# Altium PCB etapa_1.PcbDoc
Units mm, origin at the board's own origin, x right, y up, seen from the top; angles counter-clockwise.
Board outline 52 x 52 mm, 6 copper layers (Top Layer, Pot_Gnd, X, Y, Ground, Bottom Layer); 444 components, 196 nets, 1134 pads, 0 vias.
Unrouted connection lines stored in the file: 918.
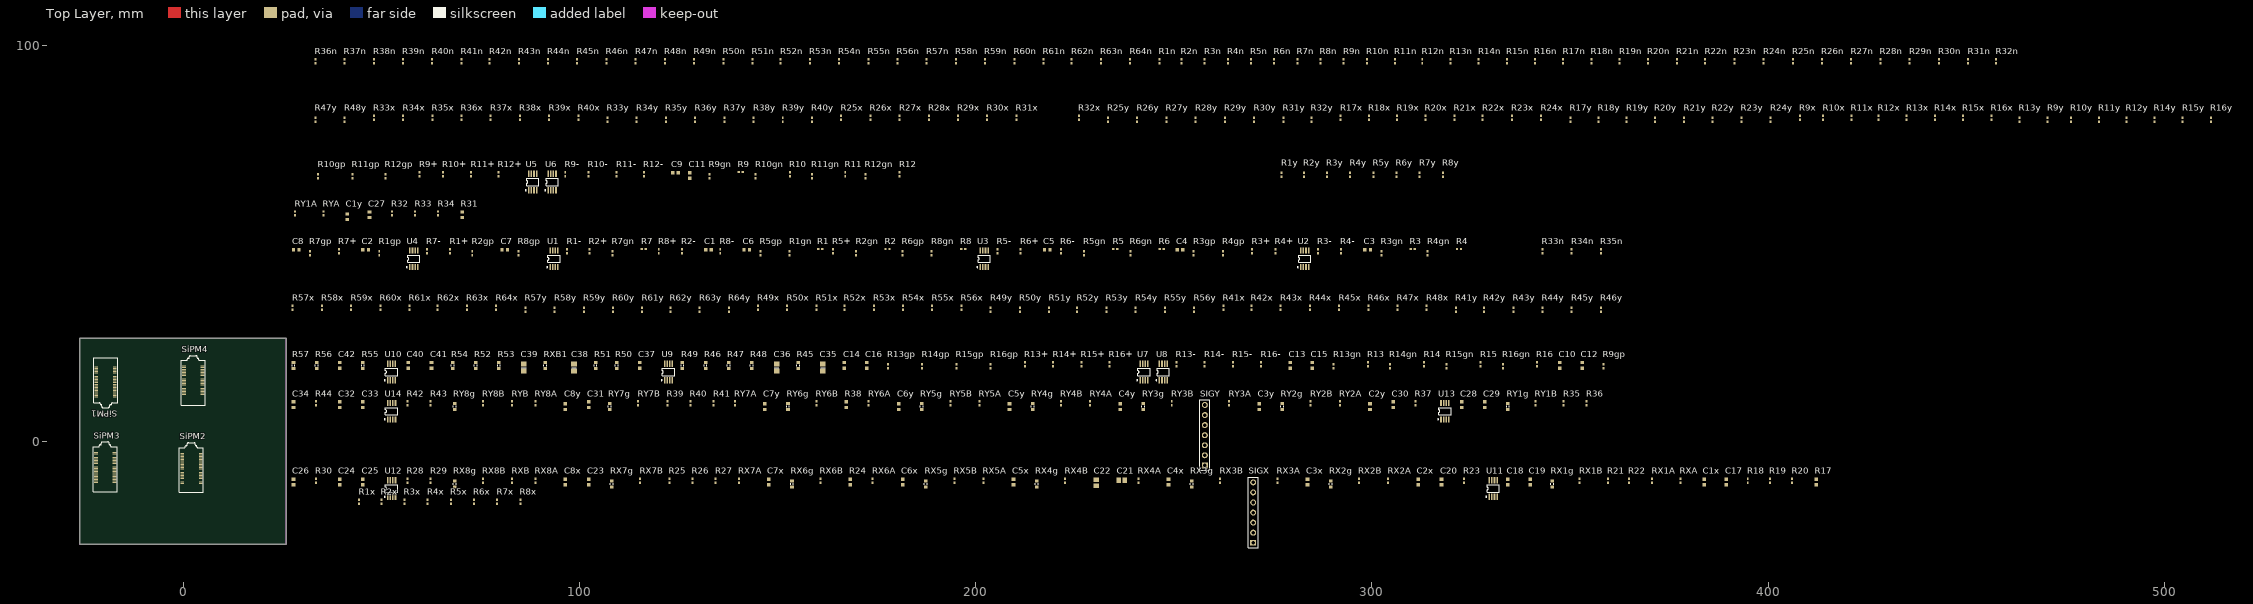
[diagram p0: Top Layer view]
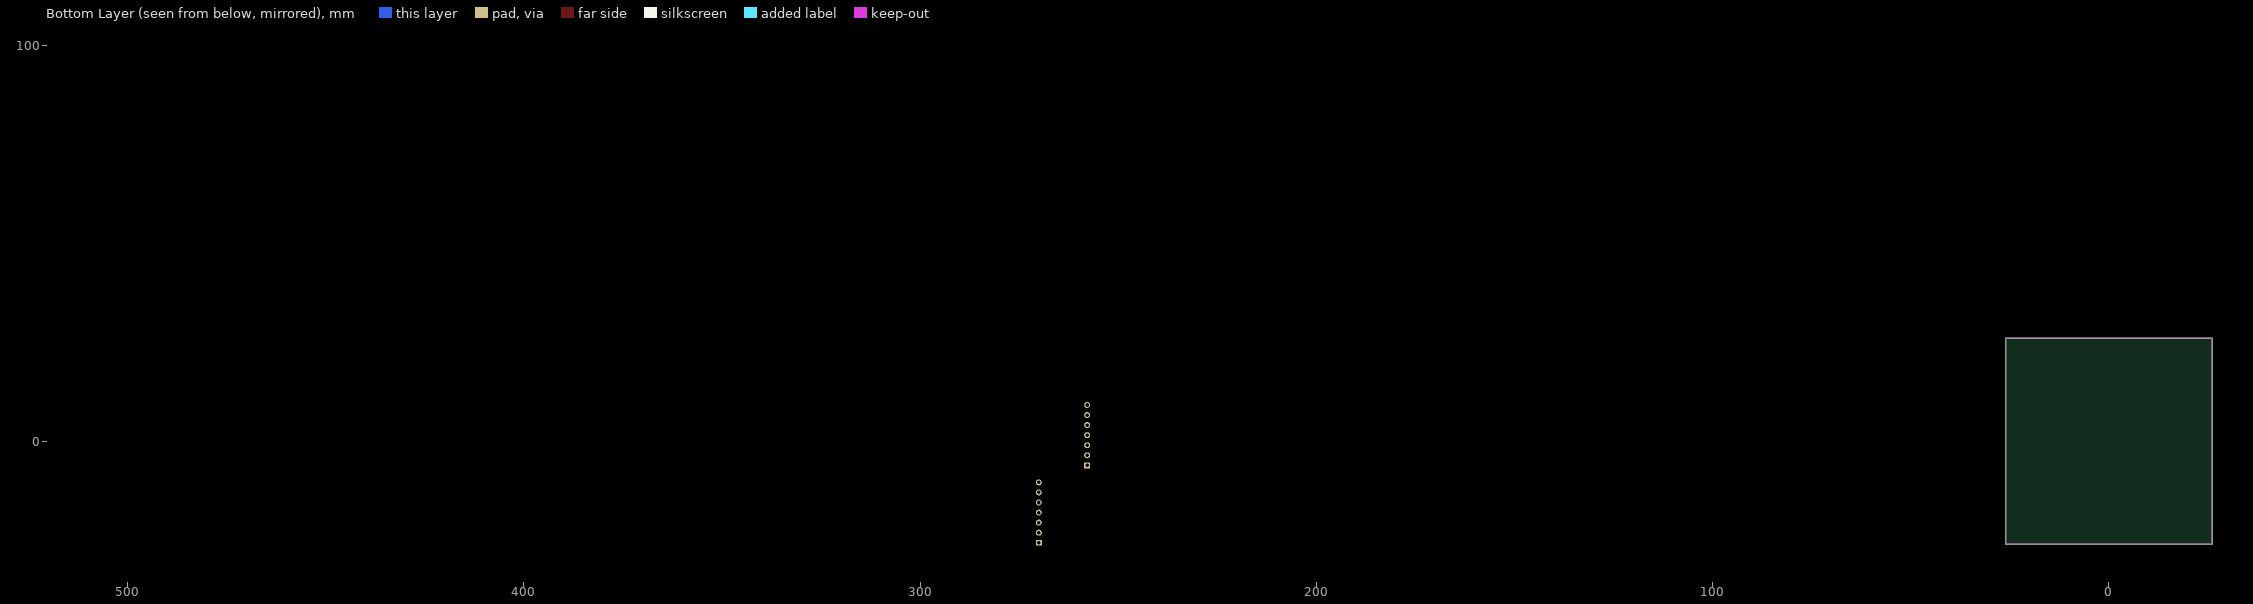
[diagram p1: Bottom Layer view, seen from below]
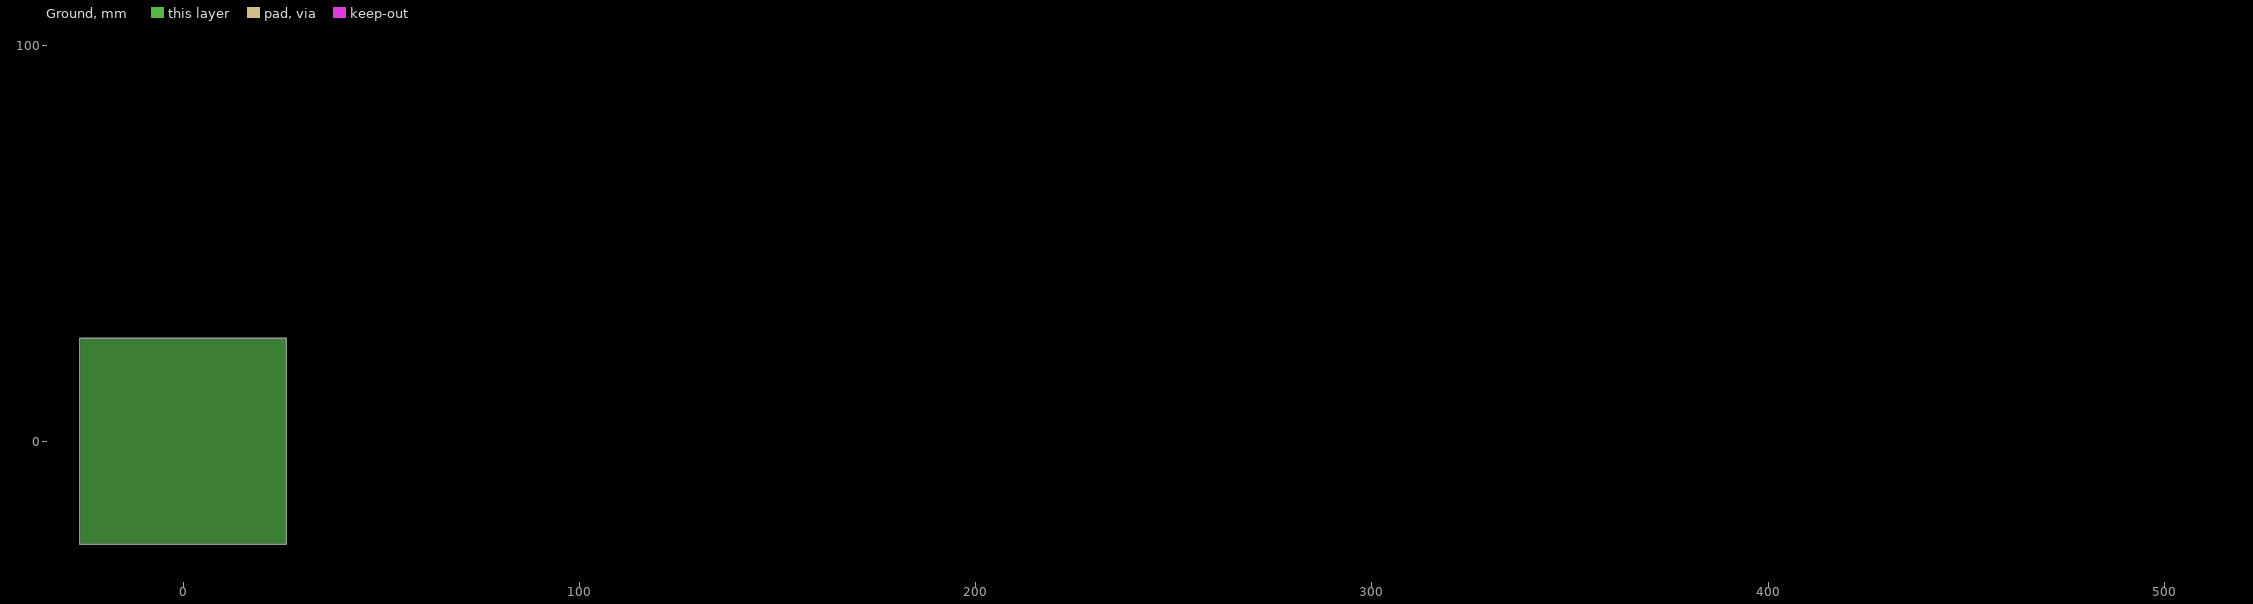
[diagram p2: Ground, clearances drawn from the general rule]

## Layer stack, top to bottom
Top Layer: signal copper 0.0356
Dielectric: prepreg 0.32, FR-4, Dk 4.8
Pot_Gnd: signal copper 0.0356
Dielectric: core 0.32, FR-4, Dk 4.8
X: signal copper 0.0356
Dielectric: prepreg 0.32, FR-4, Dk 4.8
Y: signal copper 0.0356
Dielectric: core 0.32, FR-4, Dk 4.8
Ground: plane copper 0.0356, net GND
Dielectric: prepreg 0.32, FR-4, Dk 4.8
Bottom Layer: signal copper 0.0356

## Board outline
-26,26 -26,-26 26,-26 26,26 -26,26

## Design rules (kind name [scope] priority, off if disabled: settings)
Clearance Clearance_2 [InComponent('SiPM1') vs ALL] p1: gap=0.15
Clearance Clearance_1 [IsTrack vs IsVia OR IsPad] p2: gap=0.203
Clearance [All] p3: gap=0.152
MinimumSolderMaskSliver MinimumSolderMaskSliver_1 [InComponent('SiPM1')] p1: minsoldermaskwidth=0.05
MinimumSolderMaskSliver [All] p2: minsoldermaskwidth=0.14
PasteMaskExpansion [InComponent('SiPM1')] p1: expansion=0
PlaneClearance [All] p1: clearance=0.508
PlaneConnect PlaneConnect_1 [IsVia AND InNet('GND')] p1: planeconnectstyle=Direct reliefexpansion=0.508 reliefentries=4 reliefconductorwidth=0.254 reliefairgap=0.254
PlaneConnect [All] p2: planeconnectstyle=Relief reliefexpansion=0.508 reliefentries=4 reliefconductorwidth=0.254 reliefairgap=0.254
PolygonConnect [All] p1: connectstyle=Relief reliefconductorwidth=0.254 reliefentries=4 polygonreliefangle="90 Angle"
RoutingTopology [All] p1: topology=Daisy_Balanced
RoutingVias [All] p1: holewidth=0.203 width=0.406 viastyle="Through Hole" minholewidth=0.203 minwidth=0.406 maxholewidth=0.203 maxwidth=0.406
SilkToSilkClearance [All] p1: silktosilkclearance=0.127
SilkscreenOverComponentPads [All] p1: minsilkscreentomaskgap=0.127
SolderMaskExpansion SolderMaskExpansion_2 [(InComponent('SiPM1') OR InComponent('SiPM2') OR InComponent('SiPM3') OR InComponent('SiPM4'))] p1: expansion=0.05
SolderMaskExpansion SolderMaskExpansion_1 [IsVia] p2: expansion=0.051
SolderMaskExpansion [All] p3: expansion=0.051
Width Width_1 [(InNet('GND') AND OnLayer('Bottom Layer'))] p1: maxlimit=0.381 minlimit=0.254 preferedwidth=0.305
Width [All] p2: maxlimit=0.381 minlimit=0.152 preferedwidth=0.152 toplayer_maxwidth=0.152 midlayer1_maxwidth=0.152 midlayer2_maxwidth=0.152 midlayer3_minwidth=0.254 midlayer3_prefwidth=0.305 bottomlayer_maxwidth=0.152 minimp=50.000000 maximp=50.000000 favimp=50.000000
21 further rules are at their usual default settings.

## Classes and differential pairs
component class etapa_1: R1y R2x R2y R3x R3y R4y R5y R6x R6y R7x R7y R8y R9x R9y R10x R10y R11x R11y R12x R12y R13x R13y R14x R14y R15x R15y R16x R16y R17x R17y R18x R18y R19x R19y R20x R20y R21x R21y R22x R22y R23x R23y R24x R24y R25x R25y R26x R26y R27x R27y R28x R28y R29x R29y R30x R30y R31x R31y R32x R32y R33x R33y R34x R34y R35x R35y R36x R36y R37x R37y R38x R38y R39x R39y R40x R40y R41x R41y R42x R42y R43x R43y R44x R44y R45x R45y R46x R46y R47x R47y R48x R48y R49x R49y R50x R50y R51x R51y R52x R52y R53x R53y R54x R54y R55x R55y R56x R56y R57x R57y R58x R58y R59x R59y R60x R60y R61x R61y R62x R62y R63x R63y R64x R64y SiPM1 SiPM2
component class etapa1_suma: C9 C10 C11 C12 C13 C14 C15 C16 C35 C36 C37 C38 C39 C40 C41 C42 R9 R9+ R9- R9gn R9gp R10 R10+ R10- R10gn R10gp R11 R11+ R11- R11gn R11gp R12 R12+ R12- R12gn R12gp R13 R13+ R13- R13gn R13gp R14 R14+ R14- R14gn R14gp R15 R15+ R15- R15gn R15gp R16 R16+ R16- R16gn R16gp R45 R46 R47 R48 R49 R50 R51 R52 R53 R54 R55 R56 R57 RXB1 U5 U6 U7 U8 U9 U10
component class etapa1_anger_X: C1x C2x C3x C4x C5x C6x C7x C8x C17 C18 C19 C20 C21 C22 C23 C24 C25 C26 R17 R18 R19 R20 R21 R22 R23 R24 R25 R26 R27 R28 R29 R30 RX1A RX1B RX1g RX2A RX2B RX2g RX3A RX3B RX3g RX4A RX4B RX4g RX5A RX5B RX5g RX6A RX6B RX6g RX7A RX7B RX7g RX8A RX8B RX8g RXA RXB SIGX U11 U12
component class etapa1_anger_Y: C1y C2y C3y C4y C5y C6y C7y C8y C27 C28 C29 C30 C31 C32 C33 C34 R31 R32 R33 R34 R35 R36 R37 R38 R39 R40 R41 R42 R43 R44 RY1A RY1B RY1g RY2A RY2B RY2g RY3A RY3B RY3g RY4A RY4B RY4g RY5A RY5B RY5g RY6A RY6B RY6g RY7A RY7B RY7g RY8A RY8B RY8g RYA RYB SIGY U13 U14
component class etapa_1_2: C1 C2 C3 C4 C5 C6 C7 C8 R1 R1+ R1- R1gn R1gp R1n R2 R2+ R2- R2gn R2gp R2n R3 R3+ R3- R3gn R3gp R3n R4 R4+ R4- R4gn R4gp R4n R5 R5+ R5- R5gn R5gp R5n R6 R6+ R6- R6gn R6gp R6n R7 R7+ R7- R7gn R7gp R7n R8 R8+ R8- R8gn R8gp R8n R9n R10n R11n R12n R13n R14n R15n R16n R17n R18n R19n R20n R21n R22n R23n R24n R25n R26n R27n R28n R29n R30n R31n R32n R33n R34n R35n R36n R37n R38n R39n R40n R41n R42n R43n R44n R45n R46n R47n R48n R49n R50n R51n R52n R53n R54n R55n R56n R57n R58n R59n R60n R61n R62n R63n R64n SiPM3 SiPM4 U1 U2 U3 U4

## Components (designator, comment, footprint, x,y, rotation, side; value= is the part's Value field where it differs from the comment)
C1 "Cap" 1608[0603] 132.607,48.381 r0 top
C1x "Cap" 1608[0603] 383.915,-10.243 r90 top
C1y "Cap" 1608[0603] 41.472,56.712 r90 top
C2 "Cap" 1608[0603] 46.069,48.381 r0 top
C2x "Cap" 1608[0603] 311.728,-10.243 r90 top
C2y "Cap" 1608[0603] 299.561,8.782 r90 top
C3 "Cap" 1608[0603] 298.952,48.381 r0 top
C3x "Cap" 1608[0603] 283.788,-10.243 r90 top
C3y "Cap" 1608[0603] 271.596,8.782 r90 top
C4 "Cap" 1608[0603] 251.606,48.381 r0 top
C4x "Cap" 1608[0603] 248.71,-10.243 r90 top
C4y "Cap" 1608[0603] 236.518,8.782 r90 top
C5 "Cap" 1608[0603] 218.078,48.381 r0 top
C5x "Cap" 1608[0603] 209.594,-10.243 r90 top
C5y "Cap" 1608[0603] 208.578,8.782 r90 top
C6 "Cap" 1608[0603] 142.284,48.381 r0 top
C6x "Cap" 1608[0603] 181.629,-10.243 r90 top
C6y "Cap" 1608[0603] 180.613,8.782 r90 top
C7 "Cap" 1608[0603] 81.223,48.381 r0 top
C7x "Cap" 1608[0603] 147.847,-10.243 r90 top
C7y "Cap" 1608[0603] 146.831,8.782 r90 top
C8 "Cap" 1608[0603] 28.543,48.381 r0 top
C8x "Cap" 1608[0603] 96.514,-10.243 r90 top
C8y "Cap" 1608[0603] 96.514,8.782 r90 top
C9 "Cap" 1608[0603] 124.276,67.761 r0 top
C10 "Cap" 1608[0603] 347.491,19.171 r90 top
C11 "Cap" 1608[0603] 127.933,67.1 r90 top
C12 "Cap" 1608[0603] 353.079,19.171 r90 top
C13 "Cap" 1608[0603] 279.394,19.171 r90 top
C14 "Cap" 1608[0603] 166.922,19.171 r90 top
C15 "Cap" 1608[0603] 284.982,19.171 r90 top
C16 "Cap" 1608[0603] 172.51,19.171 r90 top
C17 "Cap" 1608[0603] 389.503,-10.243 r90 top
C18 "Cap" 1608[0603] 334.359,-10.243 r90 top
C19 "Cap" 1608[0603] 339.947,-10.243 r90 top
C20 "Cap" 1608[0603] 317.595,-10.243 r90 top
C21 "Cap Pol3" C0805 236.874,-9.836 r0 top
C22 "Cap Pol3" C0805 230.422,-10.446 r90 top
C23 "Cap" 1608[0603] 102.356,-10.243 r90 top
C24 "Cap" 1608[0603] 39.567,-10.243 r90 top
C25 "Cap" 1608[0603] 45.409,-10.243 r90 top
C26 "Cap" 1608[0603] 27.883,-10.243 r90 top
C27 "Cap" 1608[0603] 47.06,57.22 r90 top
C28 "Cap" 1608[0603] 322.675,9.29 r90 top
C29 "Cap" 1608[0603] 328.517,9.29 r90 top
C30 "Cap" 1608[0603] 305.403,9.29 r90 top
C31 "Cap" 1608[0603] 102.356,9.29 r90 top
C32 "Cap" 1608[0603] 39.567,9.29 r90 top
C33 "Cap" 1608[0603] 45.409,9.29 r90 top
C34 "Cap" 1608[0603] 27.883,9.29 r90 top
C35 "Cap" 6-0805_N 161.487,18.637 r90 top
C36 "Cap Pol3" 6-0805_N 149.803,18.637 r90 top
C37 "Cap" 1608[0603] 115.284,19.171 r90 top
C38 "Cap" 6-0805_N 98.673,18.637 r90 top
C39 "Cap Pol3" 6-0805_N 85.973,18.637 r90 top
C40 "Cap" 1608[0603] 56.839,19.171 r90 top
C41 "Cap" 1608[0603] 62.706,19.171 r90 top
C42 "Cap" 1608[0603] 39.567,19.171 r90 top
R1 "Res3" 0402 160.776,48.584 r0 top
R1+ "Res3" 0402 67.405,48.025 r90 top
R1- "Res3" 0402 96.945,48.025 r90 top
R1gn "Res3" 0402 153.105,47.517 r90 top
R1gp "Res3" 0402 49.524,47.517 r90 top
R1n "Res3" 0402 246.374,95.955 r90 top
R1x "Res3" 0402 44.444,-15.196 r90 top
R1y "Res3" 0402 277.26,67.329 r90 top
R2 "Res3" 0402 177.794,48.584 r0 top
R2+ "Res3" 0402 102.533,48.025 r90 top
R2- "Res3" 0402 125.901,48.025 r90 top
R2gn "Res3" 0402 169.869,47.517 r90 top
R2gp "Res3" 0402 72.993,47.517 r90 top
R2n "Res3" 0402 251.987,95.955 r90 top
R2x "Res3" 0402 50.057,-15.196 r90 top
R2y "Res3" 0402 282.848,67.329 r90 top
R3 "Res3" 0402 310.331,48.584 r0 top
R3+ "Res3" 0402 269.818,48.025 r90 top
R3- "Res3" 0402 286.404,48.025 r90 top
R3gn "Res3" 0402 302.406,47.517 r90 top
R3gp "Res3" 0402 255.06,47.517 r90 top
R3n "Res3" 0402 257.829,95.955 r90 top
R3x "Res3" 0402 55.899,-15.196 r90 top
R3y "Res3" 0402 288.69,67.329 r90 top
R4 "Res3" 0402 322.015,48.584 r0 top
R4+ "Res3" 0402 275.66,48.025 r90 top
R4- "Res3" 0402 292.246,48.025 r90 top
R4gn "Res3" 0402 314.09,47.517 r90 top
R4gp "Res3" 0402 262.452,47.517 r90 top
R4n "Res3" 0402 263.671,95.955 r90 top
R4x "Res3" 0402 61.741,-15.196 r90 top
R4y "Res3" 0402 294.557,67.329 r90 top
R5 "Res3" 0402 235.299,48.584 r0 top
R5+ "Res3" 0402 164.027,48.025 r90 top
R5- "Res3" 0402 205.53,48.025 r90 top
R5gn "Res3" 0402 227.374,47.517 r90 top
R5gp "Res3" 0402 145.739,47.517 r90 top
R5n "Res3" 0402 269.513,95.955 r90 top
R5x "Res3" 0402 67.583,-15.196 r90 top
R5y "Res3" 0402 300.399,67.329 r90 top
R6 "Res3" 0402 246.983,48.584 r0 top
R6+ "Res3" 0402 211.372,48.025 r90 top
R6- "Res3" 0402 221.532,48.025 r90 top
R6gn "Res3" 0402 239.058,47.517 r90 top
R6gp "Res3" 0402 181.578,47.517 r90 top
R6n "Res3" 0402 275.355,95.955 r90 top
R6x "Res3" 0402 73.425,-15.196 r90 top
R6y "Res3" 0402 306.241,67.329 r90 top
R7 "Res3" 0402 116.3,48.584 r0 top
R7+ "Res3" 0402 39.364,48.025 r90 top
R7- "Res3" 0402 61.538,48.025 r90 top
R7gn "Res3" 0402 108.375,47.517 r90 top
R7gp "Res3" 0402 31.998,47.517 r90 top
R7n "Res3" 0402 281.222,95.955 r90 top
R7x "Res3" 0402 79.292,-15.196 r90 top
R7y "Res3" 0402 312.083,67.329 r90 top
R8 "Res3" 0402 196.869,48.584 r0 top
R8+ "Res3" 0402 120.059,48.025 r90 top
R8- "Res3" 0402 135.579,48.025 r90 top
R8gn "Res3" 0402 188.944,47.517 r90 top
R8gp "Res3" 0402 84.677,47.517 r90 top
R8n "Res3" 0402 287.064,95.955 r90 top
R8x "Res3" 0402 85.134,-15.196 r90 top
R8y "Res3" 0402 317.925,67.329 r90 top
R9 "Res3" 0402 140.735,67.964 r0 top
R9+ "Res3" 0402 59.734,67.405 r90 top
R9- "Res3" 0402 96.463,67.405 r90 top
R9gn "Res3" 0402 132.81,66.897 r90 top
R9gp "Res3" 0402 358.489,18.967 r90 top
R9n "Res3" 0402 292.906,95.955 r90 top
R9x "Res3" 0402 408.045,81.68 r90 top
R9y "Res3" 0402 470.579,81.172 r90 top
R10 "Res3" 0402 153.13,67.405 r90 top
R10+ "Res3" 0402 65.576,67.405 r90 top
R10- "Res3" 0402 102.33,67.405 r90 top
R10gn "Res3" 0402 144.494,66.897 r90 top
R10gp "Res3" 0402 34.08,66.897 r90 top
R10n "Res3" 0402 298.748,95.955 r90 top
R10x "Res3" 0402 413.912,81.68 r90 top
R10y "Res3" 0402 476.421,81.172 r90 top
R11 "Res3" 0402 167.126,67.405 r90 top
R11+ "Res3" 0402 72.714,67.405 r90 top
R11- "Res3" 0402 109.442,67.405 r90 top
R11gn "Res3" 0402 158.744,66.897 r90 top
R11gp "Res3" 0402 42.716,66.897 r90 top
R11n "Res3" 0402 305.86,95.955 r90 top
R11x "Res3" 0402 421.024,81.68 r90 top
R11y "Res3" 0402 483.533,81.172 r90 top
R12 "Res3" 0402 180.842,67.405 r90 top
R12+ "Res3" 0402 79.572,67.405 r90 top
R12- "Res3" 0402 116.3,67.405 r90 top
R12gn "Res3" 0402 172.206,66.897 r90 top
R12gp "Res3" 0402 51.098,66.897 r90 top
R12n "Res3" 0402 312.744,95.955 r90 top
R12x "Res3" 0402 427.882,81.68 r90 top
R12y "Res3" 0402 490.417,81.172 r90 top
R13 "Res3" 0402 299.002,19.475 r90 top
R13+ "Res3" 0402 212.465,19.475 r90 top
R13- "Res3" 0402 250.717,19.475 r90 top
R13gn "Res3" 0402 290.366,18.967 r90 top
R13gp "Res3" 0402 177.895,18.967 r90 top
R13n "Res3" 0402 319.856,95.955 r90 top
R13x "Res3" 0402 434.994,81.68 r90 top
R13y "Res3" 0402 463.467,81.172 r90 top
R14 "Res3" 0402 313.226,19.475 r90 top
R14+ "Res3" 0402 219.577,19.475 r90 top
R14- "Res3" 0402 257.829,19.475 r90 top
R14gn "Res3" 0402 304.59,18.967 r90 top
R14gp "Res3" 0402 186.531,18.967 r90 top
R14n "Res3" 0402 326.968,95.955 r90 top
R14x "Res3" 0402 442.106,81.68 r90 top
R14y "Res3" 0402 497.529,81.172 r90 top
R15 "Res3" 0402 327.476,19.475 r90 top
R15+ "Res3" 0402 226.689,19.475 r90 top
R15- "Res3" 0402 264.941,19.475 r90 top
R15gn "Res3" 0402 318.84,18.967 r90 top
R15gp "Res3" 0402 195.193,18.967 r90 top
R15n "Res3" 0402 334.08,95.955 r90 top
R15x "Res3" 0402 449.218,81.68 r90 top
R15y "Res3" 0402 504.641,81.172 r90 top
R16 "Res3" 0402 341.7,19.475 r90 top
R16+ "Res3" 0402 233.801,19.475 r90 top
R16- "Res3" 0402 272.078,19.475 r90 top
R16gn "Res3" 0402 333.064,18.967 r90 top
R16gp "Res3" 0402 203.829,18.967 r90 top
R16n "Res3" 0402 341.192,95.955 r90 top
R16x "Res3" 0402 456.355,81.68 r90 top
R16y "Res3" 0402 511.753,81.172 r90 top
R17 "Res3" 1608[0603] 412.134,-10.243 r90 top
R17n "Res3" 0402 348.304,95.955 r90 top
R17x "Res3" 0402 292.144,81.68 r90 top
R17y "Res3" 0402 350.107,81.172 r90 top
R18 "Res3" 0402 394.887,-9.938 r90 top
R18n "Res3" 0402 355.441,95.955 r90 top
R18x "Res3" 0402 299.282,81.68 r90 top
R18y "Res3" 0402 357.219,81.172 r90 top
R19 "Res3" 0402 400.501,-9.938 r90 top
R19n "Res3" 0402 362.553,95.955 r90 top
R19x "Res3" 0402 306.394,81.68 r90 top
R19y "Res3" 0402 364.331,81.172 r90 top
R20 "Res3" 0402 406.089,-9.938 r90 top
R20n "Res3" 0402 369.665,95.955 r90 top
R20x "Res3" 0402 313.506,81.68 r90 top
R20y "Res3" 0402 371.443,81.172 r90 top
R21 "Res3" 0402 359.581,-9.938 r90 top
R21n "Res3" 0402 377.031,95.955 r90 top
R21x "Res3" 0402 320.872,81.68 r90 top
R21y "Res3" 0402 378.835,81.172 r90 top
R22 "Res3" 0402 364.915,-9.938 r90 top
R22n "Res3" 0402 384.143,95.955 r90 top
R22x "Res3" 0402 327.984,81.68 r90 top
R22y "Res3" 0402 385.947,81.172 r90 top
R23 "Res3" 0402 323.234,-9.938 r90 top
R23n "Res3" 0402 391.535,95.955 r90 top
R23x "Res3" 0402 335.375,81.68 r90 top
R23y "Res3" 0402 393.313,81.172 r90 top
R24 "Res3" 1608[0603] 168.421,-10.243 r90 top
R24n "Res3" 0402 398.901,95.955 r90 top
R24x "Res3" 0402 342.741,81.68 r90 top
R24y "Res3" 0402 400.679,81.172 r90 top
R25 "Res3" 0402 122.726,-9.938 r90 top
R25n "Res3" 0402 406.267,95.955 r90 top
R25x "Res3" 0402 166.084,81.68 r90 top
R25y "Res3" 0402 233.445,81.172 r90 top
R26 "Res3" 0402 128.568,-9.938 r90 top
R26n "Res3" 0402 413.633,95.955 r90 top
R26x "Res3" 0402 173.476,81.68 r90 top
R26y "Res3" 0402 240.811,81.172 r90 top
R27 "Res3" 0402 134.41,-9.938 r90 top
R27n "Res3" 0402 420.999,95.955 r90 top
R27x "Res3" 0402 180.842,81.68 r90 top
R27y "Res3" 0402 248.177,81.172 r90 top
R28 "Res3" 0402 56.661,-9.938 r90 top
R28n "Res3" 0402 428.365,95.955 r90 top
R28x "Res3" 0402 188.208,81.68 r90 top
R28y "Res3" 0402 255.568,81.172 r90 top
R29 "Res3" 0402 62.503,-9.938 r90 top
R29n "Res3" 0402 435.756,95.955 r90 top
R29x "Res3" 0402 195.574,81.68 r90 top
R29y "Res3" 0402 262.934,81.172 r90 top
R30 "Res3" 0402 33.522,-9.938 r90 top
R30n "Res3" 0402 443.122,95.955 r90 top
R30x "Res3" 0402 202.94,81.68 r90 top
R30y "Res3" 0402 270.3,81.172 r90 top
R31 "Res3" 1608[0603] 70.453,57.22 r90 top
R31n "Res3" 0402 450.488,95.955 r90 top
R31x "Res3" 0402 210.331,81.68 r90 top
R31y "Res3" 0402 277.666,81.172 r90 top
R32 "Res3" 0402 52.724,57.525 r90 top
R32n "Res3" 0402 457.6,95.955 r90 top
R32x "Res3" 0402 226.079,81.68 r90 top
R32y "Res3" 0402 284.778,81.172 r90 top
R33 "Res3" 0402 58.566,57.525 r90 top
R33n "Res3" 0402 343.071,48.025 r90 top
R33x "Res3" 0402 48.177,81.68 r90 top
R33y "Res3" 0402 107.131,81.172 r90 top
R34 "Res3" 0402 64.408,57.525 r90 top
R34n "Res3" 0402 350.437,48.025 r90 top
R34x "Res3" 0402 55.543,81.68 r90 top
R34y "Res3" 0402 114.497,81.172 r90 top
R35 "Res3" 0402 348.405,9.595 r90 top
R35n "Res3" 0402 357.803,48.025 r90 top
R35x "Res3" 0402 62.909,81.68 r90 top
R35y "Res3" 0402 121.863,81.172 r90 top
R36 "Res3" 0402 354.247,9.595 r90 top
R36n "Res3" 0402 33.395,95.955 r90 top
R36x "Res3" 0402 70.275,81.68 r90 top
R36y "Res3" 0402 129.254,81.172 r90 top
R37 "Res3" 0402 311.042,9.595 r90 top
R37n "Res3" 0402 40.761,95.955 r90 top
R37x "Res3" 0402 77.641,81.68 r90 top
R37y "Res3" 0402 136.62,81.172 r90 top
R38 "Res3" 1608[0603] 167.405,9.29 r90 top
R38n "Res3" 0402 48.152,95.955 r90 top
R38x "Res3" 0402 85.033,81.68 r90 top
R38y "Res3" 0402 143.986,81.172 r90 top
R39 "Res3" 0402 122.218,9.595 r90 top
R39n "Res3" 0402 55.518,95.955 r90 top
R39x "Res3" 0402 92.399,81.68 r90 top
R39y "Res3" 0402 151.352,81.172 r90 top
R40 "Res3" 0402 128.06,9.595 r90 top
R40n "Res3" 0402 62.884,95.955 r90 top
R40x "Res3" 0402 99.765,81.68 r90 top
R40y "Res3" 0402 158.718,81.172 r90 top
R41 "Res3" 0402 133.902,9.595 r90 top
R41n "Res3" 0402 70.25,95.955 r90 top
R41x "Res3" 0402 262.528,33.75 r90 top
R41y "Res3" 0402 321.227,33.242 r90 top
R42 "Res3" 0402 56.661,9.595 r90 top
R42n "Res3" 0402 77.362,95.955 r90 top
R42x "Res3" 0402 269.64,33.75 r90 top
R42y "Res3" 0402 328.339,33.242 r90 top
R43 "Res3" 0402 62.503,9.595 r90 top
R43n "Res3" 0402 84.753,95.955 r90 top
R43x "Res3" 0402 277.006,33.75 r90 top
R43y "Res3" 0402 335.731,33.242 r90 top
R44 "Res3" 0402 33.522,9.595 r90 top
R44n "Res3" 0402 92.119,95.955 r90 top
R44x "Res3" 0402 284.372,33.75 r90 top
R44y "Res3" 0402 343.097,33.242 r90 top
R45 "Res3" J1-0603 155.238,19.171 r90 top
R45n "Res3" 0402 99.485,95.955 r90 top
R45x "Res3" 0402 291.763,33.75 r90 top
R45y "Res3" 0402 350.463,33.242 r90 top
R46 "Res3" J1-0603 131.87,19.171 r90 top
R46n "Res3" 0402 106.851,95.955 r90 top
R46x "Res3" 0402 299.129,33.75 r90 top
R46y "Res3" 0402 357.829,33.242 r90 top
R47 "Res3" J1-0603 137.712,19.171 r90 top
R47n "Res3" 0402 114.217,95.955 r90 top
R47x "Res3" 0402 306.495,33.75 r90 top
R47y "Res3" 0402 33.42,81.172 r90 top
R48 "Res3" J1-0603 143.554,19.171 r90 top
R48n "Res3" 0402 121.583,95.955 r90 top
R48x "Res3" 0402 313.861,33.75 r90 top
R48y "Res3" 0402 40.786,81.172 r90 top
R49 "Res3" J1-0603 126.028,19.171 r90 top
R49n "Res3" 0402 128.975,95.955 r90 top
R49x "Res3" 0402 145.104,33.75 r90 top
R49y "Res3" 0402 203.803,33.242 r90 top
R50 "Res3" J1-0603 109.442,19.171 r90 top
R50n "Res3" 0402 136.341,95.955 r90 top
R50x "Res3" 0402 152.47,33.75 r90 top
R50y "Res3" 0402 211.195,33.242 r90 top
R51 "Res3" J1-0603 104.108,19.171 r90 top
R51n "Res3" 0402 143.707,95.955 r90 top
R51x "Res3" 0402 159.836,33.75 r90 top
R51y "Res3" 0402 218.561,33.242 r90 top
R52 "Res3" J1-0603 73.882,19.171 r90 top
R52n "Res3" 0402 150.819,95.955 r90 top
R52x "Res3" 0402 166.948,33.75 r90 top
R52y "Res3" 0402 225.673,33.242 r90 top
R53 "Res3" J1-0603 79.724,19.171 r90 top
R53n "Res3" 0402 158.185,95.955 r90 top
R53x "Res3" 0402 174.339,33.75 r90 top
R53y "Res3" 0402 233.039,33.242 r90 top
R54 "Res3" J1-0603 68.04,19.171 r90 top
R54n "Res3" 0402 165.551,95.955 r90 top
R54x "Res3" 0402 181.705,33.75 r90 top
R54y "Res3" 0402 240.405,33.242 r90 top
R55 "Res3" J1-0603 45.409,19.171 r90 top
R55n "Res3" 0402 172.942,95.955 r90 top
R55x "Res3" 0402 189.071,33.75 r90 top
R55y "Res3" 0402 247.771,33.242 r90 top
R56 "Res3" J1-0603 33.725,19.171 r90 top
R56n "Res3" 0402 180.308,95.955 r90 top
R56x "Res3" 0402 196.437,33.75 r90 top
R56y "Res3" 0402 255.162,33.242 r90 top
R57 "Res3" J1-0603 27.883,19.171 r90 top
R57n "Res3" 0402 187.674,95.955 r90 top
R57x "Res3" 0402 27.68,33.75 r90 top
R57y "Res3" 0402 86.404,33.242 r90 top
R58n "Res3" 0402 195.04,95.955 r90 top
R58x "Res3" 0402 35.046,33.75 r90 top
R58y "Res3" 0402 93.77,33.242 r90 top
R59n "Res3" 0402 202.406,95.955 r90 top
R59x "Res3" 0402 42.412,33.75 r90 top
R59y "Res3" 0402 101.136,33.242 r90 top
R60n "Res3" 0402 209.798,95.955 r90 top
R60x "Res3" 0402 49.803,33.75 r90 top
R60y "Res3" 0402 108.502,33.242 r90 top
R61n "Res3" 0402 217.164,95.955 r90 top
R61x "Res3" 0402 57.169,33.75 r90 top
R61y "Res3" 0402 115.868,33.242 r90 top
R62n "Res3" 0402 224.276,95.955 r90 top
R62x "Res3" 0402 64.281,33.75 r90 top
R62y "Res3" 0402 122.98,33.242 r90 top
R63n "Res3" 0402 231.642,95.955 r90 top
R63x "Res3" 0402 71.647,33.75 r90 top
R63y "Res3" 0402 130.372,33.242 r90 top
R64n "Res3" 0402 239.008,95.955 r90 top
R64x "Res3" 0402 79.013,33.75 r90 top
R64y "Res3" 0402 137.738,33.242 r90 top
RX1A "Res3" 0402 370.757,-9.938 r90 top
RX1B "Res3" 0402 352.444,-9.938 r90 top
RX1g "Res3" J1-0603 345.535,-10.751 r90 top
RX2A "Res3" 0402 304.159,-9.938 r90 top
RX2B "Res3" 0402 296.793,-9.938 r90 top
RX2g "Res3" J1-0603 289.63,-10.751 r90 top
RX3A "Res3" 0402 276.219,-9.938 r90 top
RX3B "Res3" 0402 261.715,-9.938 r90 top
RX3g "Res3" J1-0603 254.552,-10.751 r90 top
RX4A "Res3" 0402 241.141,-9.938 r90 top
RX4B "Res3" 0402 222.599,-9.938 r90 top
RX4g "Res3" J1-0603 215.436,-10.751 r90 top
RX5A "Res3" 0402 202.025,-9.938 r90 top
RX5B "Res3" 0402 194.659,-9.938 r90 top
RX5g "Res3" J1-0603 187.471,-10.751 r90 top
RX6A "Res3" 0402 174.06,-9.938 r90 top
RX6B "Res3" 0402 160.852,-9.938 r90 top
RX6g "Res3" J1-0603 153.689,-10.751 r90 top
RX7A "Res3" 0402 140.278,-9.938 r90 top
RX7B "Res3" 0402 115.36,-9.938 r90 top
RX7g "Res3" J1-0603 108.198,-10.751 r90 top
RX8A "Res3" 0402 88.944,-9.938 r90 top
RX8B "Res3" 0402 75.711,-9.938 r90 top
RX8g "Res3" J1-0603 68.548,-10.751 r90 top
RXA "Res3" 0402 377.869,-9.938 r90 top
RXB "Res3" 0402 83.077,-9.938 r90 top
RXB1 "Res3" J1-0603 91.408,19.171 r90 top
RY1A "Res3" 0402 28.315,57.525 r90 top
RY1B "Res3" 0402 341.268,9.595 r90 top
RY1g "Res3" J1-0603 334.359,8.782 r90 top
RY2A "Res3" 0402 291.992,9.595 r90 top
RY2B "Res3" 0402 284.601,9.595 r90 top
RY2g "Res3" J1-0603 277.438,8.782 r90 top
RY3A "Res3" 0402 264.027,9.595 r90 top
RY3B "Res3" 0402 249.523,9.595 r90 top
RY3g "Res3" J1-0603 242.36,8.782 r90 top
RY4A "Res3" 0402 228.949,9.595 r90 top
RY4B "Res3" 0402 221.583,9.595 r90 top
RY4g "Res3" J1-0603 214.42,8.782 r90 top
RY5A "Res3" 0402 201.009,9.595 r90 top
RY5B "Res3" 0402 193.643,9.595 r90 top
RY5g "Res3" J1-0603 186.455,8.782 r90 top
RY6A "Res3" 0402 173.044,9.595 r90 top
RY6B "Res3" 0402 159.836,9.595 r90 top
RY6g "Res3" J1-0603 152.673,8.782 r90 top
RY7A "Res3" 0402 139.262,9.595 r90 top
RY7B "Res3" 0402 114.852,9.595 r90 top
RY7g "Res3" J1-0603 107.69,8.782 r90 top
RY8A "Res3" 0402 88.944,9.595 r90 top
RY8B "Res3" 0402 75.711,9.595 r90 top
RY8g "Res3" J1-0603 68.548,8.782 r90 top
RYA "Res3" 0402 35.427,57.525 r90 top
RYB "Res3" 0402 83.077,9.595 r90 top
SIGX "Header 7" HDR1X7 270.072,-25.584 r90 top
SIGY "Header 7" HDR1X7 257.88,-6.052 r90 top
SiPM1 "SS4-20-X-X-D" SS4-20-X-X-D -19.533,15.011 r270 top
SiPM2 "SS4-20-X-X-D" SS4-20-X-X-D 2.108,-6.807 r90 top
SiPM3 "SS4-20-X-X-D" SS4-20-X-X-D -19.634,-6.629 r90 top
SiPM4 "SS4-20-X-X-D" SS4-20-X-X-D 2.565,15.189 r90 top
U1 "AD8056AR" RM-8 93.618,46.069 r0 top
U2 "AD8056AR" RM-8 283.077,46.069 r0 top
U3 "AD8056AR" RM-8 202.203,46.069 r0 top
U4 "AD8056AR" RM-8 58.236,46.069 r0 top
U5 "AD8056AR" RM-8 88.259,65.449 r0 top
U6 "AD8056AR" RM-8 93.161,65.449 r0 top
U7 "AD8056AR" RM-8 242.513,17.52 r0 top
U8 "AD8056AR" RM-8 247.39,17.52 r0 top
U9 "AD8056AR" RM-8 122.498,17.52 r0 top
U10 "AD8056AR" RM-8 52.622,17.52 r0 top
U11 "AD8056ARM" RM-8 330.651,-11.894 r0 top
U12 "AD8056ARM" RM-8 52.648,-11.894 r0 top
U13 "AD8056ARM" RM-8 318.459,7.639 r0 top
U14 "AD8056ARM" RM-8 52.648,7.639 r0 top

## Footprints (in the part's own frame and the unit in brackets; to place one, negate y for a bottom-side part, rotate by r counter-clockwise, add the part's x,y. Pads: shape width x height; smd on the part's side, far side on the other; paste and mask are expansions set on the pad)
6-0805_N [mm] "Chip Resistor, Body 2.0x1.2mm, IPC Medium Density"
  rect 1.2x1.4 smd: 1(-0.9,0) 2(0.9,0)
  silkscreen extent 0,-0.6 0,0.6, body extent -1.07,-0.7 1.07,0.7, height 0.7
0402 [mm] "Chip Capacitor, Body 1.0x0.5mm, IPC High Density"
  rect 0.6x0.5 smd: 1(-0.5,0) 2(0.5,0)
  body extent -0.55,-0.3 0.55,0.3, height 1.3
1608[0603] [mm] "Chip Capacitor, Body 1.6x0.8mm, IPC High Density"
  rect 0.8x0.9 smd: 1(-0.7,0) 2(0.7,0)
  body extent -0.87,-0.48 0.87,0.48, height 1.3
C0805 [mm] "Chip Capacitor, Body 2.0x1.3mm, IPC High Density"
  rect 1.1x1.4 smd: 1(-0.75,0) 2(0.75,0)
  body extent -1.1,-0.72 1.1,0.72, height 1.4
HDR1X7 [mm] "Connector; Header; 7 Position"
  rect 1.5x1.5 hole 0.9: 1(0,0)
  round 1.5 hole 0.9: 2(2.54,0) 3(5.08,0) 4(7.62,0) 5(10.16,0) 6(12.7,0) 7(15.24,0)
  silkscreen extent -1.27,-1.27 16.51,1.27
J1-0603 [mm] "Chip Resistor, Body 1.6x0.8mm, IPC High Density"
  rect 0.7x0.9 smd: 1(-0.75,0) 2(0.75,0)
  silkscreen extent -0.2,-0.35 0.2,0.35, body extent -0.85,-0.48 0.85,0.48, height 0.9
RM-8 [mm] "Shrink Small Outline, MSOP; 8 Leads; Body Width 3 mm; Pitch 0.65 mm"
  rect 0.4x1.55 smd: 1(-0.975,-2.075) 2(-0.325,-2.075) 3(0.325,-2.075) 4(0.975,-2.075) 5(0.975,2.075) 6(0.325,2.075) 7(-0.325,2.075) 8(-0.975,2.075)
  silkscreen extent -1.85,-2.2 1.55,0.9
SS4-20-X-X-D [mm]
  rect 0.23x0.93 smd paste-0.02 mask+0.05: 1(3.8,2.335) 2(3.8,-2.335) 3(3.4,2.335) 4(3.4,-2.335) 5(3,2.335) 6(3,-2.335) 7(2.6,2.335) 8(2.6,-2.335) 9(2.2,2.335) 10(2.2,-2.335) 11(1.8,2.335) 12(1.8,-2.335) 13(1.4,2.335) 14(1.4,-2.335) 15(1,2.335) 16(1,-2.335) 17(0.6,2.335) 18(0.6,-2.335) 19(0.2,2.335) 20(0.2,-2.335) 21(-0.2,2.335) 22(-0.2,-2.335) 23(-0.6,2.335) 24(-0.6,-2.335) 25(-1,2.335) 26(-1,-2.335) 27(-1.4,2.335) 28(-1.4,-2.335) 29(-1.8,2.335) 30(-1.8,-2.335) 31(-2.2,2.335) 32(-2.2,-2.335) 33(-2.6,2.335) 34(-2.6,-2.335) 35(-3,2.335) 36(-3,-2.335) 37(-3.4,2.335) 38(-3.4,-2.335) 39(-3.8,2.335) 40(-3.8,-2.335)
  silkscreen extent -6.06,-3.05 6.48,3.05

## Part data
C1 C1x C1y C2 C2x C2y C3 C3x C3y C4 C4x C4y C5 C5x C5y C6 C6x C6y C7 C7x C7y C8 C8x C8y C9 C10 C11 C12 C13 C14 C15 C16 C17 C18 C19 C20 C23 C24 C25 C26 C27 C28 C29 C30 C31 C32 C33 C34 C35 C37 C38 C40 C41 C42: "Capacitor"
C21 C22 C36 C39: "Polarized Capacitor (Surface Mount)"
R1 R1+ R1- R1gn R1gp R1n R1x R1y R2 R2+ R2- R2gn R2gp R2n R2x R2y R3 R3+ R3- R3gn R3gp R3n R3x R3y R4 R4+ R4- R4gn R4gp R4n R4x R4y R5 R5+ R5- R5gn R5gp R5n R5x R5y R6 R6+ R6- R6gn R6gp R6n R6x R6y R7 R7+ R7- R7gn R7gp R7n R7x R7y R8 R8+ R8- R8gn R8gp R8n R8x R8y R9 R9+ R9- R9gn R9gp R9n R9x R9y R10 R10+ R10- R10gn R10gp R10n R10x R10y R11 R11+ R11- R11gn R11gp R11n R11x R11y R12 R12+ R12- R12gn R12gp R12n R12x R12y R13 R13+ R13- R13gn R13gp R13n R13x R13y R14 R14+ R14- R14gn R14gp R14n R14x R14y R15 R15+ R15- R15gn R15gp R15n R15x R15y R16 R16+ R16- R16gn R16gp R16n R16x R16y R17 R17n R17x R17y R18 R18n R18x R18y R19 R19n R19x R19y R20 R20n R20x R20y R21 R21n R21x R21y R22 R22n R22x R22y R23 R23n R23x R23y R24 R24n R24x R24y R25 R25n R25x R25y R26 R26n R26x R26y R27 R27n R27x R27y R28 R28n R28x R28y R29 R29n R29x R29y R30 R30n R30x R30y R31 R31n R31x R31y R32 R32n R32x R32y R33 R33n R33x R33y R34 R34n R34x R34y R35 R35n R35x R35y R36 R36n R36x R36y R37 R37n R37x R37y R38 R38n R38x R38y R39 R39n R39x R39y R40 R40n R40x R40y R41 R41n R41x R41y R42 R42n R42x R42y R43 R43n R43x R43y R44 R44n R44x R44y R45 R45n R45x R45y R46 R46n R46x R46y R47 R47n R47x R47y R48 R48n R48x R48y R49 R49n R49x R49y R50 R50n R50x R50y R51 R51n R51x R51y R52 R52n R52x R52y R53 R53n R53x R53y R54 R54n R54x R54y R55 R55n R55x R55y R56 R56n R56x R56y R57 R57n R57x R57y R58n R58x R58y R59n R59x R59y R60n R60x R60y R61n R61x R61y R62n R62x R62y R63n R63x R63y R64n R64x R64y RX1A RX1B RX1g RX2A RX2B RX2g RX3A RX3B RX3g RX4A RX4B RX4g RX5A RX5B RX5g RX6A RX6B RX6g RX7A RX7B RX7g RX8A RX8B RX8g RXA RXB RXB1 RY1A RY1B RY1g RY2A RY2B RY2g RY3A RY3B RY3g RY4A RY4B RY4g RY5A RY5B RY5g RY6A RY6B RY6g RY7A RY7B RY7g RY8A RY8B RY8g RYA RYB: "Resistor"
SIGX SIGY: "Header, 7-Pin"
U1 U2 U3 U4 U5 U6 U7 U8 U9 U10 U11 U12 U13 U14: "Low Cost, 300MHz Voltage Feedback Amplifier"

## Nets (pads, with @x,y where several pads share a name; then routed paths per layer and width w, separated by ;. In a path a pad name is that pad's centre, name@x,y a point inside that pad or via, vN(x,y) a via of type N, cw(c..) or ccw(c..) an arc to the next point about the centre after c; other vN are vias at no path point)
+5: C1.2 C3.2 C5.2 C7.2 C9.2 C11.2 C13.2 C15.2 C17.1 C21.1 C23.1 C27.1 C31.1 C35.2 C36.1 C37.1 SIGX.3 U1.8 U2.8 U3.8 U4.8 U5.8 U6.8 U7.8 U8.8 U9.8 U10.8 U11.8 U12.8 U13.8 U14.8
+HV: SiPM1.1 SiPM1.2 SiPM1.9 SiPM1.10 SiPM1.11 SiPM1.12 SiPM1.19 SiPM1.20 SiPM1.21 SiPM1.22 SiPM1.29 SiPM1.30 SiPM1.31 SiPM1.32 SiPM1.39 SiPM1.40 SiPM2.1 SiPM2.2 SiPM2.9 SiPM2.10 SiPM2.11 SiPM2.12 SiPM2.19 SiPM2.20 SiPM2.21 SiPM2.22 SiPM2.29 SiPM2.30 SiPM2.31 SiPM2.32 SiPM2.39 SiPM2.40 SiPM3.1 SiPM3.2 SiPM3.9 SiPM3.10 SiPM3.11 SiPM3.12 SiPM3.19 SiPM3.20 SiPM3.21 SiPM3.22 SiPM3.29 SiPM3.30 SiPM3.31 SiPM3.32 SiPM3.39 SiPM3.40 SiPM4.1 SiPM4.2 SiPM4.9 SiPM4.10 SiPM4.11 SiPM4.12 SiPM4.19 SiPM4.20 SiPM4.21 SiPM4.22 SiPM4.29 SiPM4.30 SiPM4.31 SiPM4.32 SiPM4.39 SiPM4.40
-5: C2.2 C4.2 C6.2 C8.2 C10.2 C12.2 C14.2 C16.2 C20.2 C22.2 C26.2 C30.2 C34.2 C38.2 C39.2 C42.2 SIGX.5 U1.4 U2.4 U3.4 U4.4 U5.4 U6.4 U7.4 U8.4 U9.4 U10.4 U11.4 U12.4 U13.4 U14.4
GND: C1.1 C2.1 C3.1 C4.1 C5.1 C6.1 C7.1 C8.1 C9.1 C10.1 C11.1 C12.1 C13.1 C14.1 C15.1 C16.1 C17.2 C19.2 C20.1 C21.2 C22.1 C23.2 C25.2 C26.1 C27.2 C29.2 C30.1 C31.2 C33.2 C34.1 C35.1 C36.2 C37.2 C38.1 C39.1 C41.2 C42.1 R1gn.1 R1gp.2 R1n.1 R2gn.1 R2gp.2 R2n.1 R3gn.1 R3gp.2 R3n.1 R4gn.1 R4gp.2 R4n.1 R5gn.1 R5gp.2 R5n.1 R6gn.1 R6gp.2 R6n.1 R7gn.1 R7gp.2 R7n.1 R8gn.1 R8gp.2 R8n.1 R9gn.1 R9gp.2 R9n.1 R10gn.1 R10gp.2 R10n.1 R11gn.1 R11gp.2 R11n.1 R12gn.1 R12gp.2 R12n.1 R13gn.1 R13gp.2 R13n.1 R14gn.1 R14gp.2 R14n.1 R15gn.1 R15gp.2 R15n.1 R16gn.1 R16gp.2 R16n.1 R17.2 R17n.1 R18n.1 R19n.1 R20n.1 R21n.1 R22n.1 R23.2 R23n.1 R24.2 R24n.1 R25n.1 R26n.1 R27n.1 R28n.1 R29n.1 R30.2 R30n.1 R31.2 R31n.1 R32n.1 R33n.1 R34n.1 R35n.1 R36n.1 R37.2 R37n.1 R38.2 R38n.1 R39n.1 R40n.1 R41n.1 R42n.1 R43n.1 R44.2 R44n.1 R45.2 R45n.1 R46n.1 R47n.1 R48n.1 R49n.1 R50.1 R50n.1 R51n.1 R52n.1 R53n.1 R54n.1 R55.2 R55n.1 R56n.1 R57.1 R57n.1 R58n.1 R59n.1 R60n.1 R61n.1 R62n.1 R63n.1 R64n.1 RX1g.1 RX2g.1 RX3g.1 RX4g.1 RX5g.1 RX6g.1 RX7g.1 RX8g.1 RY1g.1 RY2g.1 RY3g.1 RY4g.1 RY5g.1 RY6g.1 RY7g.1 RY8g.1 SIGX.2 SIGX.4 SIGX.6 SIGY.2 SIGY.3 SIGY.5 SIGY.6
NetC1x_1: C1x.1 R1.2 U1.1
NetC1x_2: C1x.2 RX1A.2 RX1B.2 RX1g.2
NetC1y_1: C1y.1 R9.2 U5.1
NetC1y_2: C1y.2 RY1A.2 RY1B.2 RY1g.2
NetC2x_1: C2x.1 R2.2 U1.7
NetC2x_2: C2x.2 RX2A.2 RX2B.2 RX2g.2
NetC2y_1: C2y.1 R10.2 U5.7
NetC2y_2: C2y.2 RY2A.2 RY2B.2 RY2g.2
NetC3x_1: C3x.1 R3.2 U2.1
NetC3x_2: C3x.2 RX3A.2 RX3B.2 RX3g.2
NetC3y_1: C3y.1 R11.2 U6.1
NetC3y_2: C3y.2 RY3A.2 RY3B.2 RY3g.2
NetC4x_1: C4x.1 R4.2 U2.7
NetC4x_2: C4x.2 RX4A.2 RX4B.2 RX4g.2
NetC4y_1: C4y.1 R12.2 U6.7
NetC4y_2: C4y.2 RY4A.2 RY4B.2 RY4g.2
NetC5x_1: C5x.1
NetC5x_2: C5x.2 RX5A.2 RX5B.2 RX5g.2
NetC5y_1: C5y.1 R13.2 U7.1
NetC5y_2: C5y.2 RY5A.2 RY5B.2 RY5g.2
NetC6x_1: C6x.1 R6.2 U3.7
NetC6x_2: C6x.2 RX6A.2 RX6B.2 RX6g.2
NetC6y_1: C6y.1 R14.2 U7.7
NetC6y_2: C6y.2 RY6A.2 RY6B.2 RY6g.2
NetC7x_1: C7x.1 R7.2 U4.1
NetC7x_2: C7x.2 RX7A.2 RX7B.2 RX7g.2
NetC7y_1: C7y.1 R15.2 U8.1
NetC7y_2: C7y.2 RY7A.2 RY7B.2 RY7g.2
NetC8x_1: C8x.1 R8.2 U4.7
NetC8x_2: C8x.2 RX8A.2 RX8B.2 RX8g.2
NetC8y_1: C8y.1 R16.2 U8.7
NetC8y_2: C8y.2 RY8A.2 RY8B.2 RY8g.2
NetC18_1: C18.1 R21.1 R22.2
NetC18_2: C18.2 R20.1 R49.1 RXA.2 U11.7
NetC19_1: C19.1 R22.1 U11.5
NetC24_1: C24.1 R28.1 R29.2
NetC24_2: C24.2 R27.1 R56.1 RXB.2 U12.1
NetC25_1: C25.1 R29.1 U12.3
NetC28_1: C28.1 R35.1 R36.2
NetC28_2: C28.2 R34.1 RYA.2 U13.7
NetC29_1: C29.1 R36.1 U13.5
NetC32_1: C32.1 R42.1 R43.2
NetC32_2: C32.2 R41.1 RYB.2 U14.1
NetC33_1: C33.1 R43.1 U14.3
NetC40_1: C40.1 R52.1 R53.2
NetC40_2: C40.2 R48.1 RXB1.2 U10.7
NetC41_1: C41.1 R53.1 U10.5
NetR1+_1: R1+.1 R1-.1 R1x.1 R2x.1 R3x.1 R4x.1 R5x.1 R6x.1 R7x.1 R8x.1
NetR1+_2: R1+.2 R1gp.1 U1.3
NetR1_1: R1-.2 R1.1 R1gn.2 U1.2
NetR1n_2: R1n.2 R1x.2 R1y.1 SiPM1.25
NetR1y_2: R1y.2 R9+.1 R9-.1 R9y.1 R17y.1 R25y.1 R33y.1 R41y.1 R49y.1 R57y.1
NetR2+_1: R2+.1 R2-.1 R9x.1 R10x.1 R11x.1 R12x.1 R13x.1 R14x.1 R15x.1 R16x.1
NetR2+_2: R2+.2 R2gp.1 U1.5
NetR2_1: R2-.2 R2.1 R2gn.2 U1.6
NetR2n_2: R2n.2 R2x.2 R2y.2 SiPM1.24
NetR2y_1: R2y.1 R10+.1 R10-.1 R10y.1 R18y.1 R26y.1 R34y.1 R42y.1 R50y.1 R58y.1
NetR3+_1: R3+.1 R3-.1 R17x.1 R18x.1 R19x.1 R20x.1 R21x.1 R22x.1 R23x.1 R24x.1
NetR3+_2: R3+.2 R3gp.1 U2.3
NetR3_1: R3-.2 R3.1 R3gn.2 U2.2
NetR3n_2: R3n.2 R3x.2 R3y.2 SiPM1.17
NetR3y_1: R3y.1 R11+.1 R11-.1 R11y.1 R19y.1 R27y.1 R35y.1 R43y.1 R51y.1 R59y.1
NetR4+_1: R4+.1 R4-.1 R25x.1 R26x.1 R27x.1 R28x.1 R29x.1 R30x.1 R31x.1 R32x.1
NetR4+_2: R4+.2 R4gp.1 U2.5
NetR4_1: R4-.2 R4.1 R4gn.2 U2.6
NetR4n_2: R4n.2 R4x.2 R4y.2 SiPM1.16
NetR4y_1: R4y.1 R12+.1 R12-.1 R12y.1 R20y.1 R28y.1 R36y.1 R44y.1 R52y.1 R60y.1
NetR5+_1: R5+.1 R5-.1 R33x.1 R34x.1 R35x.1 R36x.1 R37x.1 R38x.1 R39x.1 R40x.1
NetR5+_2: R5+.2 R5gp.1 U3.3
NetR5_1: R5-.2 R5.1 R5gn.2 U3.2
NetR5_2: R5.2 U3.1
NetR5n_2: R5n.2 R5x.2 R5y.2 SiPM2.25
NetR5y_1: R5y.1 R13+.1 R13-.1 R13y.1 R21y.1 R29y.1 R37y.1 R45y.1 R53y.1 R61y.1
NetR6+_1: R6+.1 R6-.1 R41x.1 R42x.1 R43x.1 R44x.1 R45x.1 R46x.1 R47x.1 R48x.1
NetR6+_2: R6+.2 R6gp.1 U3.5
NetR6_1: R6-.2 R6.1 R6gn.2 U3.6
NetR6n_2: R6n.2 R6x.2 R6y.2 SiPM2.24
NetR6y_1: R6y.1 R14+.1 R14-.1 R14y.1 R22y.1 R30y.1 R38y.1 R46y.1 R54y.1 R62y.1
NetR7+_1: R7+.1 R7-.1 R49x.1 R50x.1 R51x.1 R52x.1 R53x.1 R54x.1 R55x.1 R56x.1
NetR7+_2: R7+.2 R7gp.1 U4.3
NetR7_1: R7-.2 R7.1 R7gn.2 U4.2
NetR7n_2: R7n.2 R7x.2 R7y.2 SiPM2.17
NetR7y_1: R7y.1 R15+.1 R15-.1 R15y.1 R23y.1 R31y.1 R39y.1 R47y.1 R55y.1 R63y.1
NetR8+_1: R8+.1 R8-.1 R57x.1 R58x.1 R59x.1 R60x.1 R61x.1 R62x.1 R63x.1 R64x.1
NetR8+_2: R8+.2 R8gp.1 U4.5
NetR8_1: R8-.2 R8.1 R8gn.2 U4.6
NetR8n_2: R8n.2 R8x.2 R8y.2 SiPM2.16
NetR8y_1: R8y.1 R16+.1 R16-.1 R16y.1 R24y.1 R32y.1 R40y.1 R48y.1 R56y.1 R64y.1
NetR9+_2: R9+.2 R9gp.1 U5.3
NetR9_1: R9-.2 R9.1 R9gn.2 U5.2
NetR9n_2: R9n.2 R9x.2 R9y.2 SiPM1.26
NetR10+_2: R10+.2 R10gp.1 U5.5
NetR10_1: R10-.2 R10.1 R10gn.2 U5.6
NetR10n_2: R10n.2 R10x.2 R10y.2 SiPM1.27
NetR11+_2: R11+.2 R11gp.1 U6.3
NetR11_1: R11-.2 R11.1 R11gn.2 U6.2
NetR11n_2: R11n.2 R11x.2 R11y.2 SiPM1.14
NetR12+_2: R12+.2 R12gp.1 U6.5
NetR12_1: R12-.2 R12.1 R12gn.2 U6.6
NetR12n_2: R12n.2 R12x.2 R12y.2 SiPM1.15
NetR13+_2: R13+.2 R13gp.1 U7.3
NetR13_1: R13-.2 R13.1 R13gn.2 U7.2
NetR13n_2: R13n.2 R13x.2 R13y.2 SiPM2.26
NetR14+_2: R14+.2 R14gp.1 U7.5
NetR14_1: R14-.2 R14.1 R14gn.2 U7.6
NetR14n_2: R14n.2 R14x.2 R14y.2 SiPM2.27
NetR15+_2: R15+.2 R15gp.1 U8.3
NetR15_1: R15-.2 R15.1 R15gn.2 U8.2
NetR15n_2: R15n.2 R15x.2 R15y.2 SiPM2.14
NetR16+_2: R16+.2 R16gp.1 U8.5
NetR16_1: R16-.2 R16.1 R16gn.2 U8.6
NetR16n_2: R16n.2 R16x.2 R16y.2 SiPM2.15
NetR17_1: R17.1 R19.1 R20.2 U11.6
NetR17n_2: R17n.2 R17x.2 R17y.2 SiPM1.35
NetR18_1: R18.1 R19.2 R21.2 U11.1
NetR18_2: R18.2 RX1A.1 RX2A.1 RX3A.1 RX4A.1 RX5A.1 RX6A.1 RX7A.1 RX8A.1 U11.2
NetR18n_2: R18n.2 R18x.2 R18y.2 SiPM1.34
NetR19n_2: R19n.2 R19x.2 R19y.2 SiPM1.7
NetR20n_2: R20n.2 R20x.2 R20y.2 SiPM1.6
NetR21n_2: R21n.2 R21x.2 R21y.2 SiPM2.35
NetR22n_2: R22n.2 R22x.2 R22y.2 SiPM2.34
NetR23_1: R23.1 U11.3
NetR23n_2: R23n.2 R23x.2 R23y.2 SiPM2.7
NetR24_1: R24.1 R26.1 R27.2 U12.2
NetR24n_2: R24n.2 R24x.2 R24y.2 SiPM2.6
NetR25_1: R25.1 R26.2 R28.2 U12.7
NetR25_2: R25.2 RX1B.1 RX2B.1 RX3B.1 RX4B.1 RX5B.1 RX6B.1 RX7B.1 RX8B.1 U12.6
NetR25n_2: R25n.2 R25x.2 R25y.2 SiPM1.36
NetR26n_2: R26n.2 R26x.2 R26y.2 SiPM1.37
NetR27n_2: R27n.2 R27x.2 R27y.2 SiPM1.4
NetR28n_2: R28n.2 R28x.2 R28y.2 SiPM1.5
NetR29n_2: R29n.2 R29x.2 R29y.2 SiPM2.36
NetR30_1: R30.1 U12.5
NetR30n_2: R30n.2 R30x.2 R30y.2 SiPM2.37
NetR31_1: R31.1 R33.1 R34.2 U13.6
NetR31n_2: R31n.2 R31x.2 R31y.2 SiPM2.4
NetR32_1: R32.1 R33.2 R35.2 U13.1
NetR32_2: R32.2 RY1A.1 RY2A.1 RY3A.1 RY4A.1 RY5A.1 RY6A.1 RY7A.1 RY8A.1 U13.2
NetR32n_2: R32n.2 R32x.2 R32y.2 SiPM2.5
NetR33n_2: R33n.2 R33x.2 R33y.2 SiPM3.25
NetR34n_2: R34n.2 R34x.2 R34y.2 SiPM3.24
NetR35n_2: R35n.2 R35x.2 R35y.2 SiPM3.17
NetR36n_2: R36n.2 R36x.2 R36y.2 SiPM3.16
NetR37_1: R37.1 U13.3
NetR37n_2: R37n.2 R37x.2 R37y.2 SiPM4.25
NetR38_1: R38.1 R40.1 R41.2 U14.2
NetR38n_2: R38n.2 R38x.2 R38y.2 SiPM4.24
NetR39_1: R39.1 R40.2 R42.2 U14.7
NetR39_2: R39.2 RY1B.1 RY2B.1 RY3B.1 RY4B.1 RY5B.1 RY6B.1 RY7B.1 RY8B.1 U14.6
NetR39n_2: R39n.2 R39x.2 R39y.2 SiPM4.17
NetR40n_2: R40n.2 R40x.2 R40y.2 SiPM4.16
NetR41n_2: R41n.2 R41x.2 R41y.2 SiPM3.26
NetR42n_2: R42n.2 R42x.2 R42y.2 SiPM3.27
NetR43n_2: R43n.2 R43x.2 R43y.2 SiPM3.14
NetR44_1: R44.1 U14.5
NetR44n_2: R44n.2 R44x.2 R44y.2 SiPM3.15
NetR45_1: R45.1 R47.1 R48.2 U10.6
NetR45n_2: R45n.2 R45x.2 R45y.2 SiPM4.26
NetR46_1: R46.1 R47.2 R52.2 U10.1
NetR46_2: R46.2 R51.1 R54.1 U10.2
NetR46n_2: R46n.2 R46x.2 R46y.2 SiPM4.27
NetR47n_2: R47n.2 R47x.2 R47y.2 SiPM4.14
NetR48n_2: R48n.2 R48x.2 R48y.2 SiPM4.15
NetR49_2: R49.2 R50.2 U9.3
NetR49n_2: R49n.2 R49x.2 R49y.2 SiPM3.35
NetR50n_2: R50n.2 R50x.2 R50y.2 SiPM3.34
NetR51_2: R51.2 U9.1 U9.2
NetR51n_2: R51n.2 R51x.2 R51y.2 SiPM3.7
NetR52n_2: R52n.2 R52x.2 R52y.2 SiPM3.6
NetR53n_2: R53n.2 R53x.2 R53y.2 SiPM4.35
NetR54_2: R54.2 U9.6 U9.7
NetR54n_2: R54n.2 R54x.2 R54y.2 SiPM4.34
NetR55_1: R55.1 U10.3
NetR55n_2: R55n.2 R55x.2 R55y.2 SiPM4.7
NetR56_2: R56.2 R57.2 U9.5
NetR56n_2: R56n.2 R56x.2 R56y.2 SiPM4.6
NetR57n_2: R57n.2 R57x.2 R57y.2 SiPM3.36
NetR58n_2: R58n.2 R58x.2 R58y.2 SiPM3.37
NetR59n_2: R59n.2 R59x.2 R59y.2 SiPM3.4
NetR60n_2: R60n.2 R60x.2 R60y.2 SiPM3.5
NetR61n_2: R61n.2 R61x.2 R61y.2 SiPM4.36
NetR62n_2: R62n.2 R62x.2 R62y.2 SiPM4.37
NetR63n_2: R63n.2 R63x.2 R63y.2 SiPM4.5
NetR64n_2: R64n.2 R64x.2 R64y.2 SiPM4.4
NetRXA_1: RXA.1 SIGX.1
NetRXB1_1: RXB1.1 SIGY.4
NetRXB_1: RXB.1 SIGX.7
NetRYA_1: RYA.1 SIGY.7
NetRYB_1: RYB.1 SIGY.1
NetSiPM1_28: SiPM1.28 SiPM2.28 SiPM3.28 SiPM4.28
NetSiPM1_33: SiPM1.33 SiPM2.33 SiPM3.33 SiPM4.33
NetSiPM1_38: SiPM1.38 SiPM2.38 SiPM3.38 SiPM4.38
pads on no net: SiPM1.3 SiPM1.8 SiPM1.13 SiPM1.18 SiPM1.23 SiPM2.3 SiPM2.8 SiPM2.13 SiPM2.18 SiPM2.23 SiPM3.3 SiPM3.8 SiPM3.13 SiPM3.18 SiPM3.23 SiPM4.3 SiPM4.8 SiPM4.13 SiPM4.18 SiPM4.23

## Polygon pours and split planes (outlines as drawn)
GND on Ground (split plane): 25.795,-25.795 -25.795,-25.795 -25.795,25.795 25.795,25.795

## Keep-outs
Keep-Out Layer:
  the board outline again, w0.2

## Text inside footprints (layer, text, board x,y; h text height)
SiPM1: Mechanical 1 "J1" at -20.041,15.508 h0.76 r270
SiPM2: Mechanical 1 "J1" at 2.616,-7.304 h0.76 r90
SiPM3: Mechanical 1 "J1" at -19.126,-7.126 h0.76 r90
SiPM4: Mechanical 1 "J1" at 3.073,14.692 h0.76 r90